# EAGLE board V0 (EAGLE 9.3.2)
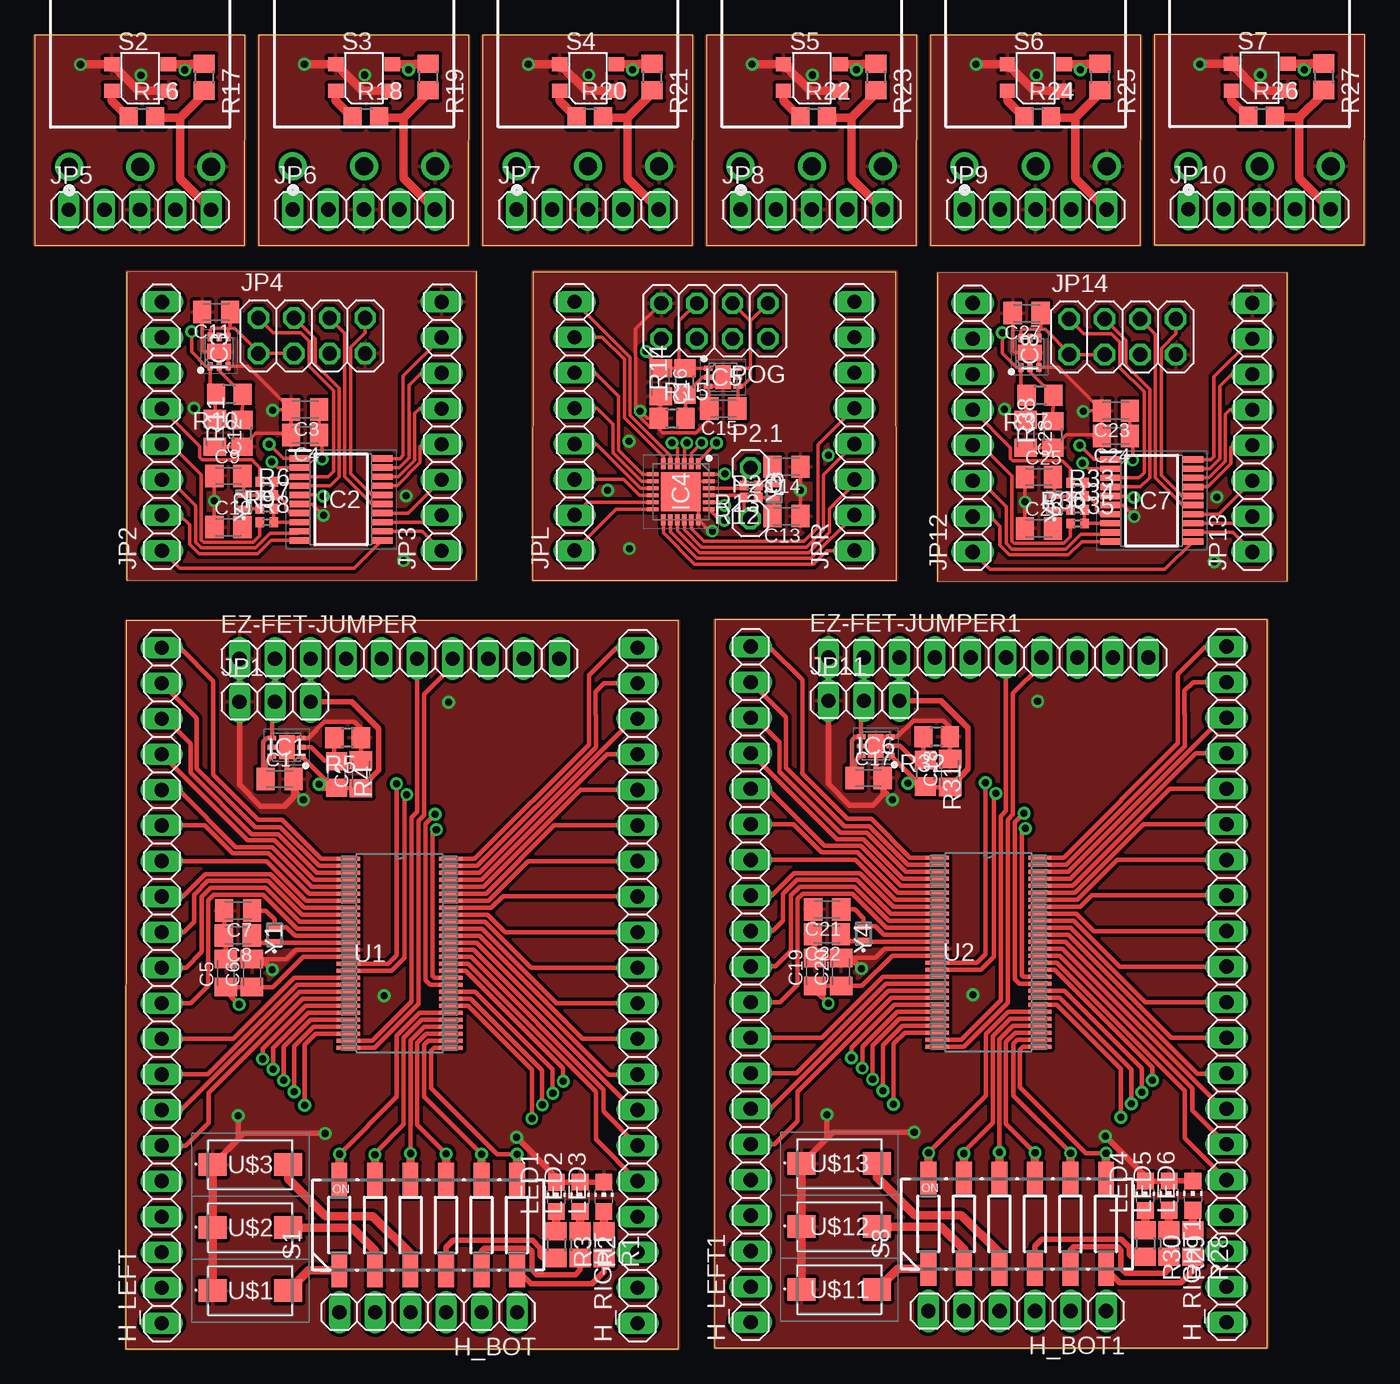
[diagram p0: board, top side]
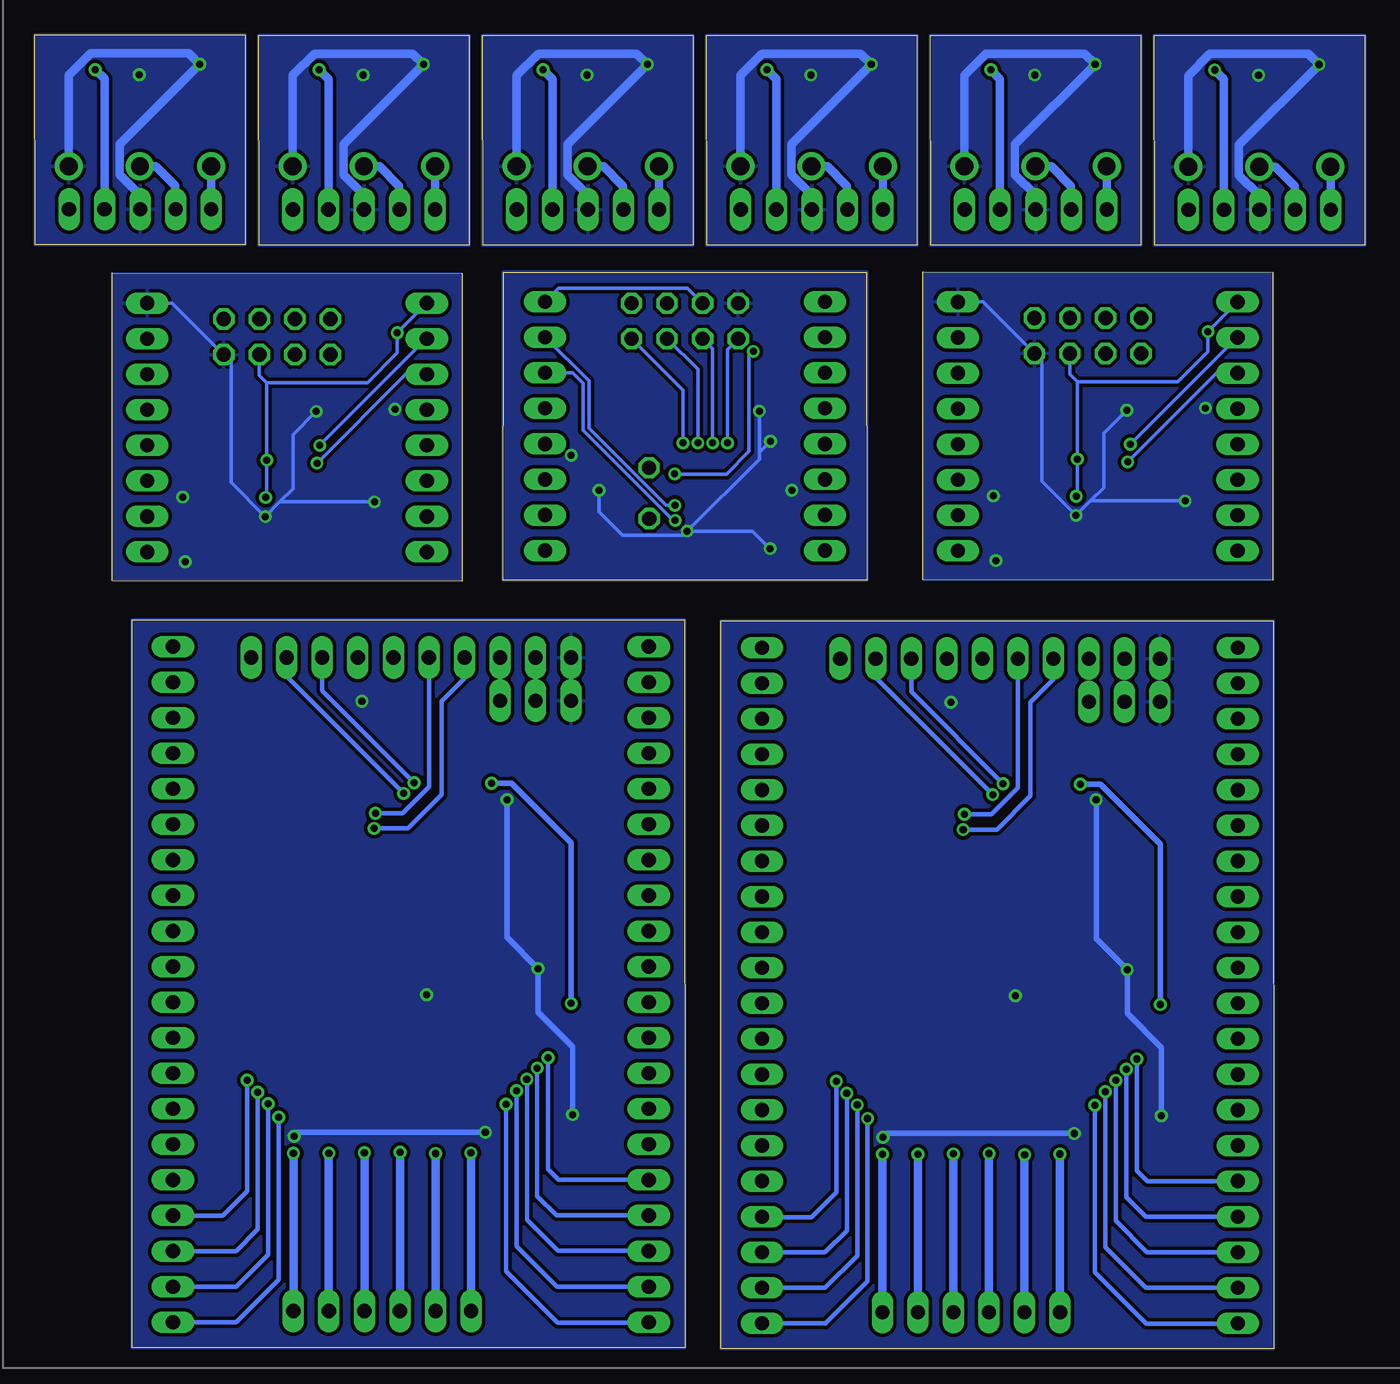
[diagram p1: board, bottom side, seen from below]

Size 95.01 x 93.86 mm. Coordinates in mm from the lower left corner, seen from the top.
Outline: 6.48,0 45.99,0.02 45.97,52.02 6.52,52.01 6.48,0
Outline: 6.56,54.92 31.55,54.95 31.56,76.94 6.57,76.92 6.56,54.92
Outline: 35.56,54.92 61.56,54.92 61.54,76.92 35.6,76.91 35.56,54.92
Outline: 0,78.83 15,78.83 15.01,93.83 0,93.83 0,78.83
Outline: 16,78.84 31,78.84 31.01,93.84 16,93.84 16,78.84
Outline: 32,78.84 47,78.84 47.01,93.84 32,93.84 32,78.84
Outline: 48,78.84 63,78.84 63.01,93.84 48,93.84 48,78.84
Outline: 64,78.84 79,78.84 79.01,93.84 64,93.84 64,78.84
Outline: 80,78.86 95,78.86 95.01,93.86 80,93.86 80,78.86
Outline: 48.57,0.08 88.08,0.1 88.06,52.1 48.61,52.09 48.57,0.08
Outline: 64.49,54.84 89.48,54.87 89.49,76.86 64.5,76.84 64.49,54.84
Copper layers (1*16): Top 0.035mm / dielectric 1.5mm / Bottom 0.035mm
Design rules "default *": minimum track width 6mil, minimum drill 0.35mm, track to track 5mil, track to pad 5mil, pad to pad 5mil, via to via 5mil, smd to smd 5mil, copper to edge 0mil, drill to drill 6mil, minimum pad ring 10mil, minimum via ring 8mil, stop-mask expansion 4mil, vias tented up to drill 0mil, thermal gap 10mil

## Footprints (pad centres in the part's own frame; a part is rotated, then mirrored left to right if it is on the bottom)
C0805K = smd 1.3 x 1.6: 1 -1,0; 2 1,0
1X10 = drill 1.016 long: 1 -11.43,0; 2 -8.89,0; 3 -6.35,0; 4 -3.81,0; 5 -1.27,0; 6 1.27,0; 7 3.81,0; 8 6.35,0; 9 8.89,0; 10 11.43,0
1X06 = drill 1.016 long: 1 -6.35,0; 2 -3.81,0; 3 -1.27,0; 4 1.27,0; 5 3.81,0; 6 6.35,0
1X20 = drill 1.016 long: 1 -24.13,0; 2 -21.59,0; 3 -19.05,0; 4 -16.51,0; 5 -13.97,0; 6 -11.43,0; 7 -8.89,0; 8 -6.35,0; 9 -3.81,0; 10 -1.27,0; 11 1.27,0; 12 3.81,0; 13 6.35,0; 14 8.89,0; 15 11.43,0; 16 13.97,0; 17 16.51,0; 18 19.05,0; 19 21.59,0; 20 24.13,0
SON65P200X200X80-7N = smd 0.6 x 0.35: 1 -1.05,0.65; 2 -1.05,0; 3 -1.05,-0.65; 4 1.05,-0.65; 5 1.05,0; 6 1.05,0.65 | smd 1.1 x 1.7: 7 0,0
SOP65P640X120-20N = smd 1.475 x 0.45: 1 -2.938,2.925; 2 -2.938,2.275; 3 -2.938,1.625; 4 -2.938,0.975; 5 -2.938,0.325; 6 -2.938,-0.325; 7 -2.938,-0.975; 8 -2.938,-1.625; 9 -2.938,-2.275; 10 -2.938,-2.925; 11 2.938,-2.925; 12 2.938,-2.275; 13 2.938,-1.625; 14 2.938,-0.975; 15 2.938,-0.325; 16 2.938,0.325; 17 2.938,0.975; 18 2.938,1.625; 19 2.938,2.275; 20 2.938,2.925
QFN50P400X400X100-25N = smd 0.8 x 0.3: 1 -2,1.25; 2 -2,0.75; 3 -2,0.25; 4 -2,-0.25; 5 -2,-0.75; 6 -2,-1.25; 13 2,-1.25; 14 2,-0.75; 15 2,-0.25; 16 2,0.25; 17 2,0.75; 18 2,1.25 | smd 0.3 x 0.8: 7 -1.25,-2; 8 -0.75,-2; 9 -0.25,-2; 10 0.25,-2; 11 0.75,-2; 12 1.25,-2; 19 1.25,2; 20 0.75,2; 21 0.25,2; 22 -0.25,2; 23 -0.75,2; 24 -1.25,2 | smd 2.8 x 2.8: 25 0,0
1X03 = drill 1.016 long: 1 -2.54,0; 2 0,0; 3 2.54,0
1X08 = drill 1.016 long: 1 -8.89,0; 2 -6.35,0; 3 -3.81,0; 4 -1.27,0; 5 1.27,0; 6 3.81,0; 7 6.35,0; 8 8.89,0
2X04 = drill 1.016 octagon: 1 -3.81,-1.27; 2 -3.81,1.27; 3 -1.27,-1.27; 4 -1.27,1.27; 5 1.27,-1.27; 6 1.27,1.27; 7 3.81,-1.27; 8 3.81,1.27
1X05 = drill 1.016 long: 1 -5.08,0; 2 -2.54,0; 3 0,0; 4 2.54,0; 5 5.08,0
CHIP-LED0805 = smd 1.2 x 1.2: A 0,-1.05; C 0,1.05
1X01 = drill 1.016 octagon: 1 0,0
R0805 = smd 1.3 x 1.5: 1 -0.95,0; 2 0.95,0
R0402 = smd 0.6 x 0.7: 1 -0.5,0; 2 0.5,0
CTS-219-06J = smd 1.13 x 2.44: 1 -6.35,-3.215; 2 -3.81,-3.215; 3 -1.27,-3.215; 4 1.27,-3.215; 5 3.81,-3.215; 6 6.35,-3.215; 7 6.35,3.215; 8 3.81,3.215; 9 1.27,3.215; 10 -1.27,3.215; 11 -3.81,3.215; 12 -6.35,3.215
D2FS-FL-N-A1 = drill 1.28 pad 2: 1 -5.08,-2.8; 2 0,-2.8; 3 5.08,-2.8
DGG56_CLEAN = smd 1.676 x 0.279: 1 -3.67,6.75; 2 -3.67,6.25; 3 -3.67,5.75; 4 -3.67,5.25; 5 -3.67,4.75; 6 -3.67,4.25; 7 -3.67,3.75; 8 -3.67,3.25; 9 -3.67,2.75; 10 -3.67,2.25; 11 -3.67,1.75; 12 -3.67,1.25; 13 -3.67,0.75; 14 -3.67,0.25; 15 -3.67,-0.25; 16 -3.67,-0.75; 17 -3.67,-1.25; 18 -3.67,-1.75; 19 -3.67,-2.25; 20 -3.67,-2.75; 21 -3.67,-3.25; 22 -3.67,-3.75; 23 -3.67,-4.25; 24 -3.67,-4.75; 25 -3.67,-5.25; 26 -3.67,-5.75; 27 -3.67,-6.25; 28 -3.67,-6.75; 29 3.67,-6.75; 30 3.67,-6.25; 31 3.67,-5.75; 32 3.67,-5.25; 33 3.67,-4.75; 34 3.67,-4.25; 35 3.67,-3.75; 36 3.67,-3.25; 37 3.67,-2.75; 38 3.67,-2.25; 39 3.67,-1.75; 40 3.67,-1.25; 41 3.67,-0.75; 42 3.67,-0.25; 43 3.67,0.25; 44 3.67,0.75; 45 3.67,1.25; 46 3.67,1.75; 47 3.67,2.25; 48 3.67,2.75; 49 3.67,3.25; 50 3.67,3.75; 51 3.67,4.25; 52 3.67,4.75; 53 3.67,5.25; 54 3.67,5.75; 55 3.67,6.25; 56 3.67,6.75
DTSM32SBF = smd 2 x 1.6: 1 -2.7,0; 2 2.7,0
4LEADSMD = smd 1.1 x 1: A -2.01,-0.97; C 2.04,0.94; E -2.01,0.94; K 2.04,-0.97
ABS05 = smd 0.5 x 1: 1 -0.55,0; 2 0.55,0

## Placement (x,y rotation side)
C1  [C0805K]  17.49,40.71 0 top
C2  [C0805K]  23.3,41.06 90 top
C3  10uF  [C0805K]  19.31,67.1 180 top
C4  100nF  [C0805K]  19.31,65.29 180 top
C5  [C0805K]  13.65,26.85 90 top
C6  [C0805K]  15.51,26.85 90 top
C7  [C0805K]  14.52,31.31 180 top
C8  [C0805K]  14.5,29.54 180 top
C9  10uF  [C0805K]  13.82,62.36 0 top
C10  10uF  [C0805K]  13.82,58.7 0 top
C11  [C0805K]  12.94,74.07 180 top
C12  [C0805K]  12.86,65.45 270 top
C13  10uF  [C0805K]  53.7,59.49 180 top
C14  10uF  [C0805K]  53.7,63.02 180 top
C15  [C0805K]  49.19,67.17 180 top
C16  [C0805K]  44.71,69.05 270 top
C17  [C0805K]  59.58,40.79 0 top
C18  [C0805K]  65.39,41.14 90 top
C19  [C0805K]  55.74,26.93 90 top
C20  [C0805K]  57.6,26.93 90 top
C21  [C0805K]  56.61,31.39 180 top
C22  [C0805K]  56.59,29.62 180 top
C23  10uF  [C0805K]  77.24,67.02 180 top
C24  100nF  [C0805K]  77.24,65.21 180 top
C25  10uF  [C0805K]  71.75,62.28 0 top
C26  10uF  [C0805K]  71.75,58.62 0 top
C27  [C0805K]  70.87,73.99 180 top
C28  [C0805K]  70.79,65.37 270 top
E$1  [METRIC_15]  -2.7,-1.33 90 top
E$2  [METRIC_15]  -2.7,-1.33 180 bottom
E$3  [METRIC_15]  -2.7,-0.33 180 bottom
E$4  [METRIC_15]  -1.7,-1.33 90 top
E$5  [METRIC_15]  -2.7,97.67 0 top  (outside the outline)
E$6  [METRIC_15]  96.29,-1.33 90 bottom
EZ-FET-JUMPER  [1X10]  26.04,49.31 0 top
EZ-FET-JUMPER1  [1X10]  68.13,49.39 0 top
H_BOT  [1X06]  28.11,2.62 180 top
H_BOT1  [1X06]  70.2,2.7 180 top
H_LEFT  [1X20]  9.06,25.96 90 top
H_LEFT1  [1X20]  51.15,26.04 90 top
H_RIGHT  [1X20]  43.06,25.96 90 top
H_RIGHT1  [1X20]  85.15,26.04 90 top
IC1  TLV75801PDRVT  [SON65P200X200X80-7N]  17.99,42.99 180 top
IC2  MSP430FR2311IPW20  [SOP65P640X120-20N]  21.87,60.68 0 top
IC3  TLV75801PDRVT  [SON65P200X200X80-7N]  13.16,71.25 90 top
IC4  MSP430FR2433IRGER  [QFN50P400X400X100-25N]  46.15,61.24 270 top
IC5  TLV75801PDRVT  [SON65P200X200X80-7N]  49.17,69.41 0 top
IC6  TLV75801PDRVT  [SON65P200X200X80-7N]  60.08,43.07 180 top
IC7  MSP430FR2311IPW20  [SOP65P640X120-20N]  79.8,60.6 0 top
IC8  TLV75801PDRVT  [SON65P200X200X80-7N]  71.09,71.17 90 top
JP1  [1X03]  17.15,46.23 0 top
JP2  [1X08]  9.08,65.9 90 top
JP3  [1X08]  29.06,65.9 90 top
JP4  [2X04]  19.78,72.38 0 top
JP5  [1X05]  7.5,81.38 0 top
JP6  [1X05]  23.5,81.39 0 top
JP7  [1X05]  39.5,81.39 0 top
JP8  [1X05]  55.5,81.39 0 top
JP9  [1X05]  71.5,81.39 0 top
JP10  [1X05]  87.5,81.41 0 top
JP11  [1X03]  59.24,46.31 0 top
JP12  [1X08]  67.01,65.82 90 top
JP13  [1X08]  86.99,65.82 90 top
JP14  [2X04]  77.71,72.3 0 top
JPL  [1X08]  38.56,65.92 90 top
JPR  [1X08]  58.56,65.92 90 top
LED1  [CHIP-LED0805]  37.25,10.86 0 top
LED2  [CHIP-LED0805]  38.95,10.87 0 top
LED3  [CHIP-LED0805]  40.65,10.87 0 top
LED4  [CHIP-LED0805]  79.34,10.94 0 top
LED5  [CHIP-LED0805]  81.04,10.95 0 top
LED6  [CHIP-LED0805]  82.74,10.95 0 top
P2.0  [1X01]  51.11,59.31 0 top
P2.1  [1X01]  51.13,62.95 0 top
POG  [2X04]  48.57,73.43 180 top
R1  [R0805]  40.65,7.45 270 top
R2  [R0805]  38.95,7.45 270 top
R3  [R0805]  37.25,7.45 270 top
R4  [R0805]  21.54,41.04 270 top
R5  [R0805]  22.34,43.65 180 top
R6  [R0402]  16.57,60.99 0 top
R7  [R0402]  16.57,60.02 0 top
R8  [R0402]  16.57,59.05 0 top
R9  [R0402]  16.57,61.95 180 top
R10  [R0805]  13.89,68.19 180 top
R11  [R0805]  14.82,65.4 90 top
R12  [R0402]  51.17,60.82 180 top
R13  [R0402]  51.17,61.68 180 top
R14  [R0805]  46.44,69.1 90 top
R15  [R0805]  45.53,66.48 0 top
R16  100  [R0805]  7.65,87.94 0 top
R17  100K  [R0805]  12.1,90.85 270 top
R18  100  [R0805]  23.65,87.95 0 top
R19  100K  [R0805]  28.1,90.86 270 top
R20  100  [R0805]  39.65,87.95 0 top
R21  100K  [R0805]  44.1,90.86 270 top
R22  100  [R0805]  55.65,87.95 0 top
R23  100K  [R0805]  60.1,90.86 270 top
R24  100  [R0805]  71.65,87.95 0 top
R25  100K  [R0805]  76.1,90.86 270 top
R26  100  [R0805]  87.65,87.97 0 top
R27  100K  [R0805]  92.1,90.88 270 top
R28  [R0805]  82.74,7.53 270 top
R29  [R0805]  81.04,7.53 270 top
R30  [R0805]  79.34,7.53 270 top
R31  [R0805]  63.63,41.12 270 top
R32  [R0805]  64.43,43.73 180 top
R33  [R0402]  74.5,60.91 0 top
R34  [R0402]  74.5,59.94 0 top
R35  [R0402]  74.5,58.97 0 top
R36  [R0402]  74.5,61.87 180 top
R37  [R0805]  71.82,68.11 180 top
R38  [R0805]  72.75,65.32 90 top
S1  219-06J  [CTS-219-06J]  28.1,8.85 0 top
S2  D2FS-FL-N-A1  [D2FS-FL-N-A1]  7.51,87.26 0 top
S3  D2FS-FL-N-A1  [D2FS-FL-N-A1]  23.51,87.27 0 top
S4  D2FS-FL-N-A1  [D2FS-FL-N-A1]  39.51,87.27 0 top
S5  D2FS-FL-N-A1  [D2FS-FL-N-A1]  55.51,87.27 0 top
S6  D2FS-FL-N-A1  [D2FS-FL-N-A1]  71.51,87.27 0 top
S7  D2FS-FL-N-A1  [D2FS-FL-N-A1]  87.51,87.29 0 top
S8  219-06J  [CTS-219-06J]  70.19,8.93 0 top
U1  MSP430FR4133IG56RDGG56-CLEAN  [DGG56_CLEAN]  26.05,28.26 0 top
U2  MSP430FR4133IG56RDGG56-CLEAN  [DGG56_CLEAN]  68.14,28.34 0 top
U$1  DTSM-32S-BF  [DTSM32SBF]  15.39,4.16 0 top
U$2  DTSM-32S-BF  [DTSM32SBF]  15.39,8.66 0 top
U$3  DTSM-32S-BF  [DTSM32SBF]  15.39,13.16 0 top
U$4  [METRIC_15]  6.48,0 90 top
U$5  [METRIC_15]  6.48,0 180 bottom
U$6  QRE1113GR  [4LEADSMD]  7.5,90.83 0 top
U$7  [METRIC_15]  0,78.83 90 top
U$8  [METRIC_15]  0,78.83 180 bottom
U$9  QRE1113GR  [4LEADSMD]  23.5,90.84 0 top
U$10  QRE1113GR  [4LEADSMD]  87.5,90.86 0 top
U$11  DTSM-32S-BF  [DTSM32SBF]  57.48,4.24 0 top
U$12  DTSM-32S-BF  [DTSM32SBF]  57.48,8.74 0 top
U$13  DTSM-32S-BF  [DTSM32SBF]  57.48,13.24 0 top
U$15  QRE1113GR  [4LEADSMD]  39.5,90.84 0 top
U$21  QRE1113GR  [4LEADSMD]  55.5,90.84 0 top
U$27  QRE1113GR  [4LEADSMD]  71.5,90.84 0 top
Y1  ABS05-32.768KHZ-9-T  [ABS05]  17.12,29.58 90 top
Y2  ABS05-32.768KHZ-9-T  [ABS05]  14.91,60.52 90 top
Y3  ABS05-32.768KHZ-9-T  [ABS05]  52.82,61.25 270 top
Y4  ABS05-32.768KHZ-9-T  [ABS05]  59.21,29.66 90 top
Y5  ABS05-32.768KHZ-9-T  [ABS05]  72.84,60.44 90 top

## Library data of the parts
C1-C28 = rcl; SPICEPREFIX: C
E$1-E$6 U$4 U$5 U$7 U$8 = ruler
EZ-FET-JUMPER EZ-FET-JUMPER1 H_BOT H_BOT1 H_LEFT H_LEFT1 H_RIGHT H_RIGHT1 JP1-JP14 JPL JPR P2.0 P2.1 POG = pinhead
IC1 IC3 IC5 IC6 IC8 = TLV75801PDRVT; DESCRIPTION: LDO Voltage Regulators 500MA LDO WITHOUT PG; HEIGHT: 0.8mm; MANUFACTURER_NAME: Texas Instruments; MANUFACTURER_PART_NUMBER: TLV75801PDRVT; MOUSER_PART_NUMBER: 595-TLV75801PDRVT; MOUSER_PRICE-STOCK: https://www.mouser.com/Search/Refine.aspx?Keyword=595-TLV75801PDRVT
IC2 IC7 = MSP430FR2311IPW20; DESCRIPTION: 16-bit Microcontrollers - MCU 16 MHz Ultra-low-power microcontroller with 4 KB FRAM, 1 KB SRAM, 12 IO, 8 ch ADC10, OpAmps, TIA 20-TSSOP -40 to 85; HEIGHT: 1.2mm; MANUFACTURER_NAME: Texas Instruments; MANUFACTURER_PART_NUMBER: MSP430FR2311IPW20; MOUSER_PART_NUMBER: 595-SP430FR2311IPW20; MOUSER_PRICE-STOCK: https://www.mouser.com/Search/Refine.aspx?Keyword=595-SP430FR2311IPW20
IC4 = MSP430FR2433IRGER; DESCRIPTION: 16 MHz Ultra-Low-Power Microcontroller with 16 KB FRAM, 4 KB RAM, 10-bit ADC, 19 IO, 4 16-bit Timers; HEIGHT: 1mm; MANUFACTURER_NAME: Texas Instruments; MANUFACTURER_PART_NUMBER: MSP430FR2433IRGER; MOUSER_PART_NUMBER: 595-SP430FR2433IRGER; MOUSER_PRICE-STOCK: https://www.mouser.com/Search/Refine.aspx?Keyword=595-SP430FR2433IRGER
LED1-LED6 = led
R1-R38 = rcl; SPICEPREFIX: R
S1 S8 = switch-dil; OC_FARNELL: unknown; OC_NEWARK: unknown
S2-S7 = D2FS-FL-N-A1; ALLIED_NUMBER: 70454797; DESCRIPTION: Microswitch, SPST-NO, lever operated, right angle; HEIGHT: mm; MANUFACTURER_NAME: Omron Electronics; MANUFACTURER_PART_NUMBER: D2FS-FL-N-A1; RS_PART_NUMBER: 8046183; RS_PRICE-STOCK: http://uk.rs-online.com/web/p/products/8046183
U1 U2 = MSP430FR4133IG56R
U$1-U$3 U$11-U$13 = DTSM-32S-B
U$6 U$9 U$10 U$15 U$21 U$27 = QRE1113GR; AVAILABILITY: Unavailable; DESCRIPTION: QRE1113 Series 30 V 50 mA Miniature Reflective Object Sensor - SMD-4; MF: ON Semiconductor; MP: QRE1113GR; PACKAGE: SMD-4 ON Semiconductor; PRICE: None
Y1-Y5 = ABS05-32.768KHZ-9-T; DESCRIPTION: Crystals 32.768KHz 9.0pF 20ppm -40C +85C; HEIGHT: mm; MANUFACTURER_NAME: ABRACON; MANUFACTURER_PART_NUMBER: ABS05-32.768KHZ-9-T; MOUSER_PART_NUMBER: 815-ABS05-32.768K9T; MOUSER_PRICE-STOCK: https://www.mouser.com/Search/Refine.aspx?Keyword=815-ABS05-32.768K9T; RS_PART_NUMBER: 815-ABS05-32.768K9T; RS_PRICE-STOCK: https://www.mouser.com/Search/Refine.aspx?Keyword=815-ABS05-32.768K9T

## Nets
+3V1: C3.1 C4.1 C12.1 IC2.5 IC3.1 JP2.8 JP4.5 R10.2
+3V2: C16.1 IC4.24 IC5.1 JPR.8 POG.5 R14.2
+3V3: C2.1 C5.1 C6.1 EZ-FET-JUMPER.3 IC1.1 JP1.3 R4.2 U1.15
+3V4: C18.1 C19.1 C20.1 EZ-FET-JUMPER1.3 IC6.1 JP11.3 R31.2 U2.15
+3V5: C23.1 C24.1 C28.1 IC7.5 IC8.1 JP12.8 JP14.5 R37.2
+5V: C1.1 EZ-FET-JUMPER.2 IC1.4 IC1.6 JP1.2
+5V1: C11.1 IC3.4 IC3.6 JP4.1 JP4.3
+5V2: C15.1 IC5.4 IC5.6 POG.1 POG.3
+5V3: C17.1 EZ-FET-JUMPER1.2 IC6.4 IC6.6 JP11.2
+5V4: C27.1 IC8.4 IC8.6 JP14.1 JP14.3
CTS: EZ-FET-JUMPER.5 U1.38
CTS1: EZ-FET-JUMPER1.5 U2.38
GND: C1.2 C2.2 C5.2 C6.2 C7.2 C8.2 EZ-FET-JUMPER.1 IC1.3 IC1.7 JP1.1 LED1.C LED2.C LED3.C R5.1 U1.14 U$1.1 U$2.1 U$3.1
GND1: C3.2 C4.2 C9.1 C10.1 C11.2 C12.2 IC2.6 IC3.3 IC3.7 JP3.8 JP4.7 R11.1
GND2: C13.1 C14.1 C15.2 C16.2 IC4.18 IC4.23 IC4.25 IC5.3 IC5.7 POG.7 R15.1
GND3: JP5.3 S2.3 U$6.E U$6.K
GND4: JP6.3 S3.3 U$9.E U$9.K
GND5: JP7.3 S4.3 U$15.E U$15.K
GND6: JP8.3 S5.3 U$21.E U$21.K
GND7: JP9.3 S6.3 U$27.E U$27.K
GND8: JP10.3 S7.3 U$10.E U$10.K
GND9: C17.2 C18.2 C19.2 C20.2 C21.2 C22.2 EZ-FET-JUMPER1.1 IC6.3 IC6.7 JP11.1 LED4.C LED5.C LED6.C R32.1 U2.14 U$11.1 U$12.1 U$13.1
GND10: C23.2 C24.2 C25.1 C26.1 C27.2 C28.2 IC7.6 IC8.3 IC8.7 JP13.8 JP14.7 R38.1
N$1: R1.2 S1.6
N$2: R2.2 S1.5
N$3: R3.2 S1.4
N$4: LED1.A R3.1
N$5: LED2.A R2.1
N$6: LED3.A R1.1
N$7: S1.1 U$1.2
N$8: S1.2 U$2.2
N$9: S1.3 U$3.2
N$10: IC2.7 R6.2 R9.1
N$11: IC2.8 R7.2 R8.2
N$12: IC1.2 R4.1 R5.2
N$13: IC3.2 R10.1 R11.2
N$14: C8.1 U1.13 Y1.1
N$15: C9.2 R6.1 Y2.2
N$16: C7.1 U1.12 Y1.2
N$17: C10.2 R7.1 Y2.1
N$18: IC5.2 R14.1 R15.2
N$19: C13.2 R12.1 Y3.2
N$20: C14.2 R13.1 Y3.1
N$21: R16.1 U$6.A
N$22: JP5.4 R17.1 U$6.C
N$23: JP5.2 S2.2
N$24: JP5.1 S2.1
N$25: R18.1 U$9.A
N$26: JP6.4 R19.1 U$9.C
N$27: JP6.2 S3.2
N$28: JP6.1 S3.1
N$29: R20.1 U$15.A
N$30: JP7.4 R21.1 U$15.C
N$31: JP7.2 S4.2
N$32: JP7.1 S4.1
N$33: R22.1 U$21.A
N$34: JP8.4 R23.1 U$21.C
N$35: JP8.2 S5.2
N$36: JP8.1 S5.1
N$37: R24.1 U$27.A
N$38: JP9.4 R25.1 U$27.C
N$39: JP9.2 S6.2
N$40: JP9.1 S6.1
N$41: R26.1 U$10.A
N$42: JP10.4 R27.1 U$10.C
N$43: JP10.2 S7.2
N$44: JP10.1 S7.1
N$45: C21.1 U2.12 Y4.2
N$46: C22.1 U2.13 Y4.1
N$47: LED4.A R30.1
N$48: LED5.A R29.1
N$49: LED6.A R28.1
N$50: S8.1 U$11.2
N$51: S8.2 U$12.2
N$52: S8.3 U$13.2
N$53: IC6.2 R31.1 R32.2
N$54: R28.2 S8.6
N$55: R29.2 S8.5
N$56: R30.2 S8.4
N$57: IC7.7 R33.2 R36.1
N$58: IC7.8 R34.2 R35.2
N$59: IC8.2 R37.1 R38.2
N$60: C25.2 R33.1 Y5.2
N$61: C26.2 R34.1 Y5.1
N/C: EZ-FET-JUMPER.10
N/C1: EZ-FET-JUMPER1.10
P1.0: IC2.2 JP2.6
P1.1: IC2.1 JP2.7
P1.2: H_LEFT.1 U1.26
P1.3: H_LEFT.2 U1.25
P1.4: H_LEFT.3 U1.24
P1.5: H_LEFT.4 U1.23
P1.6: H_LEFT.5 U1.22
P1.7: H_LEFT.6 U1.21
P1.8: IC2.20 JP3.7
P1.9: IC2.19 JP3.6
P1.10: IC2.18 JP3.5
P1.11: IC2.17 JP3.4
P1.12: IC4.10 JPL.3
P1.13: IC4.9 JPL.4
P1.14: IC4.8 JPL.5
P1.15: IC4.7 JPL.6
P1.16: IC4.5 JPL.8
P1.17: IC4.6 JPL.7
P1.18: H_LEFT1.6 U2.21
P1.19: H_LEFT1.5 U2.22
P1.20: H_LEFT1.4 U2.23
P1.21: H_LEFT1.3 U2.24
P1.22: H_LEFT1.2 U2.25
P1.23: H_LEFT1.1 U2.26
P1.24: IC7.1 JP12.7
P1.25: IC7.2 JP12.6
P1.26: IC7.20 JP13.7
P1.27: IC7.19 JP13.6
P1.28: IC7.18 JP13.5
P1.29: IC7.17 JP13.4
P2.0: H_RIGHT.6 U1.42
P2.1: H_RIGHT.5 U1.41
P2.2: H_RIGHT.4 U1.40
P2.3: IC2.14 JP3.3
P2.4: IC2.13 JP3.2
P2.5: H_RIGHT.3 U1.37
P2.6: H_RIGHT.2 U1.36
P2.7: H_RIGHT.1 U1.35
P2.8: IC2.12 JP3.1
P2.9: JP2.5 R9.2
P2.10: JP2.4 R8.1
P2.11: IC2.9 JP2.3
P2.12: IC2.10 JP2.2
P2.13: IC2.11 JP2.1
P2.14: IC4.17 JPR.5
P2.15: IC4.16 JPR.4
P2.16: IC4.15 JPR.3
P2.17: IC4.13 JPR.1
P2.18: IC4.11 JPL.2
P2.19: IC4.19 JPR.6
P2.20: H_RIGHT1.6 U2.42
P2.21: H_RIGHT1.5 U2.41
P2.22: H_RIGHT1.4 U2.40
P2.23: H_RIGHT1.3 U2.37
P2.24: H_RIGHT1.2 U2.36
P2.25: H_RIGHT1.1 U2.35
P2.26: IC7.14 JP13.3
P2.27: IC7.13 JP13.2
P2.28: IC7.12 JP13.1
P2.29: JP12.5 R36.2
P2.30: JP12.4 R35.1
P2.31: IC7.9 JP12.3
P2.32: IC7.10 JP12.2
P2.33: IC7.11 JP12.1
P3.0: H_RIGHT.20 U1.56
P3.1: H_RIGHT.19 U1.55
P3.2: H_RIGHT.18 U1.54
P3.3: H_RIGHT.17 U1.53
P3.4: H_RIGHT.16 U1.52
P3.5: H_RIGHT.15 U1.51
P3.6: H_RIGHT.14 U1.50
P3.7: H_RIGHT.13 U1.49
P3.8: IC4.14 JPR.2
P3.9: IC4.12 JPL.1
P3.10: IC4.20 JPR.7
P3.11: H_RIGHT1.20 U2.56
P3.12: H_RIGHT1.19 U2.55
P3.13: H_RIGHT1.18 U2.54
P3.14: H_RIGHT1.17 U2.53
P3.15: H_RIGHT1.16 U2.52
P3.16: H_RIGHT1.15 U2.51
P3.17: H_RIGHT1.14 U2.50
P3.18: H_RIGHT1.13 U2.49
P4.0: H_LEFT.9 U1.18
P4.1: H_LEFT1.14 U2.7
P4.2: H_LEFT1.13 U2.8
P4.3: H_LEFT.10 U1.11
P4.4: H_LEFT.11 U1.10
P4.5: H_LEFT.12 U1.9
P4.6: H_LEFT.13 U1.8
P4.7: H_LEFT.14 U1.7
P4.8: H_LEFT1.12 U2.9
P4.9: H_LEFT1.11 U2.10
P4.10: H_LEFT1.10 U2.11
P4.11: H_LEFT1.9 U2.18
P5.0: H_BOT.6 S1.12 U1.34
P5.1: H_BOT.5 S1.11 U1.33
P5.2: H_BOT.4 S1.10 U1.32
P5.3: H_BOT.3 S1.9 U1.31
P5.4: H_BOT.2 S1.8 U1.30
P5.5: H_BOT.1 S1.7 U1.29
P5.6: H_BOT1.1 S8.7 U2.29
P5.7: H_BOT1.2 S8.8 U2.30
P5.8: H_BOT1.6 S8.12 U2.34
P5.9: H_BOT1.5 S8.11 U2.33
P5.10: H_BOT1.4 S8.10 U2.32
P5.11: H_BOT1.3 S8.9 U2.31
P6.0: H_RIGHT.12 U1.48
P6.1: H_RIGHT.11 U1.47
P6.2: H_RIGHT.10 U1.46
P6.3: H_RIGHT.9 U1.45
P6.4: H_RIGHT.8 U1.44
P6.5: H_RIGHT.7 U1.43
P6.6: H_RIGHT1.12 U2.48
P6.7: H_RIGHT1.11 U2.47
P6.8: H_RIGHT1.10 U2.46
P6.9: H_RIGHT1.9 U2.45
P6.10: H_RIGHT1.8 U2.44
P6.11: H_RIGHT1.7 U2.43
P7.0: H_LEFT.15 U1.6
P7.1: H_LEFT.16 U1.5
P7.2: H_LEFT.17 U1.4
P7.3: H_LEFT.18 U1.3
P7.4: H_LEFT.19 U1.2
P7.5: H_LEFT.20 U1.1
P7.6: H_LEFT1.20 U2.1
P7.7: H_LEFT1.18 U2.3
P7.8: H_LEFT1.19 U2.2
P7.9: H_LEFT1.17 U2.4
P7.10: H_LEFT1.16 U2.5
P7.11: H_LEFT1.15 U2.6
P8.1: H_LEFT1.8 U2.19
P8.2: H_LEFT.7 U1.20
P8.3: H_LEFT.8 U1.19
P8.4: H_LEFT1.7 U2.20
RST: EZ-FET-JUMPER.8 U1.16
RST1: IC2.4 JP4.4
RST2: IC4.1 POG.2
RST3: EZ-FET-JUMPER1.8 U2.16
RST4: IC7.4 JP14.4
RTS: EZ-FET-JUMPER.4 U1.39
RTS1: EZ-FET-JUMPER1.4 U2.39
RXD: EZ-FET-JUMPER.6 U1.27
RXD1: IC2.16 JP4.8
RXD2: IC4.4 POG.8
RXD3: EZ-FET-JUMPER1.6 U2.27
RXD4: IC7.16 JP14.8
TST: EZ-FET-JUMPER.9 U1.17
TST1: IC2.3 JP4.2
TST2: IC4.2 POG.4
TST3: EZ-FET-JUMPER1.9 U2.17
TST4: IC7.3 JP14.2
TXD: EZ-FET-JUMPER.7 U1.28
TXD1: IC2.15 JP4.6
TXD2: IC4.3 POG.6
TXD3: EZ-FET-JUMPER1.7 U2.28
TXD4: IC7.15 JP14.6
VCC: JP5.5 R16.2 R17.2
VCC1: JP6.5 R18.2 R19.2
VCC2: JP7.5 R20.2 R21.2
VCC3: JP8.5 R22.2 R23.2
VCC4: JP9.5 R24.2 R25.2
VCC5: JP10.5 R26.2 R27.2
XIN: IC4.22 P2.1.1 R13.2
XOUT: IC4.21 P2.0.1 R12.2

## Tracks (layer width: path | path; a pad name or v marks a point on that pad's centre or on a via)
+3V1  (via drill 0.5)
  Top 0.254: IC2.5 20.5,61.01 v20.6,60.91 | 12.86,68.27 12.51,68.62 IC3.1 12.21,70.2 11.19,71.22 v11.19,72.67 | 12.86,68.27 R10.2 | v20.52,63.57 20.52,65.08 C4.1 C3.1 | C12.1 12.86,68.27
  Bottom 0.254: v20.6,60.91 20.52,60.99 v20.52,63.57 20.52,69.09 | 20.52,69.09 13.33,69.09 11.19,71.23 v11.19,72.67 9.08,74.78 JP2.8 | JP4.5 21.05,69.62 20.52,69.09
+3V2  (via drill 0.5)
  Top 0.254: 46.04,70.05 C16.1 43.68,71.08 v43.68,71.26 | 46.04,70.05 R14.2 IC5.1 | POG.5 46.04,73.44 46.04,70.05 | IC4.24 v49.29,62.49 v49.3,62.5
  Bottom 0.254: POG.5 48.37,75.77 55.03,75.77 57.6,75.77 JPR.8 | v49.3,62.5 v49.29,62.49 45.61,62.49 43.98,64.11 43.98,70.95 v43.68,71.26
+3V3  (via drill 0.51)
  Top 0.305: IC1.1 21.29,40.09 R4.2 21.57,40.06 C2.1 | U1.15 19.17,28.02 17,25.85 C6.1 C5.1
  Top 0.406: C5.1 13.65,25.55 v14.6,24.6 | C2.1 24.57,41.33 24.57,44.3 22.64,46.23 JP1.3 EZ-FET-JUMPER.3 | 21.57,40.06 20.57,40.06 v20.3,40.33
  Bottom 0.406: v20.3,40.33 18.87,40.33 14.6,36.06 v14.6,24.6
+3V4  (via drill 0.51)
  Top 0.254: v62.39,40.41 63.27,40.41 63.51,40.17
  Top 0.305: IC6.1 63.38,40.17 63.51,40.17 R31.2 63.66,40.14 C18.1 | U2.15 61.26,28.1 59.09,25.93 C20.1 C19.1
  Top 0.406: C19.1 55.74,25.63 v56.69,24.68 | C18.1 66.66,41.41 66.66,44.38 64.73,46.31 JP11.3 EZ-FET-JUMPER1.3
  Bottom 0.406: v62.39,40.41 60.96,40.41 56.69,36.14 v56.69,24.68
+3V5  (via drill 0.5)
  Top 0.254: IC7.5 78.44,60.93 v78.53,60.83 | 70.8,68.19 70.44,68.54 IC8.1 70.14,70.12 69.12,71.14 v69.12,72.59 | 70.8,68.19 R37.2 | v78.45,63.49 78.45,65 C24.1 C23.1 | C28.1 70.8,68.19
  Bottom 0.254: v78.53,60.83 78.45,60.91 v78.45,63.49 78.45,69.01 | 78.45,69.01 71.26,69.01 69.12,71.15 v69.12,72.59 67.01,74.7 JP12.8 | JP14.5 78.98,69.54 78.45,69.01
+5V
  Top 0.305: JP1.2 16.94,46.02 IC1.4 16.55,43.64 16.3,43.39 16.3,41.41 16.49,41.22 | IC1.6 16.49,41.89 16.49,41.22 | 16.49,41.22 C1.1
  Top 0.406: JP1.2 EZ-FET-JUMPER.2
+5V1
  Top 0.254: JP4.1 16.06,71.11 | 16.06,71.11 JP4.3 | IC3.6 12.51,72.76 12.66,72.91 13.74,72.91 | 13.74,72.91 13.81,72.84 IC3.4 | C11.1 13.94,72.94 13.91,72.91 | 13.74,72.91 13.91,72.91 | 13.91,72.91 14.26,72.91 16.06,71.11
+5V2
  Top 0.254: 51.12,73.42 POG.3 | POG.1 51.12,73.44 51.12,73.42 | 51.12,73.42 51.12,70.1 | 51.12,70.1 51.12,69.33 50.55,68.76 IC5.4 50.22,67.2 C15.1 | IC5.6 51.08,70.06 51.12,70.1
+5V3
  Top 0.305: JP11.2 59.03,46.1 IC6.4 58.64,43.72 58.39,43.47 58.39,41.49 58.58,41.3 | IC6.6 58.58,41.97 58.58,41.3 | 58.58,41.3 C17.1
  Top 0.406: JP11.2 EZ-FET-JUMPER1.2
+5V4
  Top 0.254: JP14.1 73.99,71.03 | 73.99,71.03 JP14.3 | IC8.6 70.44,72.68 70.59,72.83 71.67,72.83 | 71.67,72.83 71.74,72.76 IC8.4 | C27.1 71.87,72.86 71.84,72.83 | 71.67,72.83 71.84,72.83 | 71.84,72.83 72.19,72.83 73.99,71.03
CTS  (via drill 0.51)
  Top 0.305: U1.38 28.24,26.01 27.93,26.32 27.93,37.53 v28.59,38.19
  Bottom 0.305: v28.59,38.19 26.66,38.19 24.77,40.08 EZ-FET-JUMPER.5
CTS1  (via drill 0.51)
  Top 0.305: U2.38 70.33,26.09 70.02,26.4 70.02,37.61 v70.68,38.27
  Bottom 0.305: v70.68,38.27 68.75,38.27 66.86,40.16 EZ-FET-JUMPER1.5
GND  (via drill 0.51)
  Top 0.305: C1.2 17.99,41.21 IC1.7 18.64,43.64 IC1.3 19.51,43.64 20.68,44.81 22.81,44.81 23.29,44.33 R5.1 C2.2 | 12.69,5.05 12.45,4.81 12.45,4.4 U$1.1 | C7.2 13.52,29.56 C8.2 13.65,29.39 C5.2 C6.2 17.96,27.85 18.62,28.51 U1.14
  Top 0.406: C6.2 16.2,27.85 v16.96,27.09 | EZ-FET-JUMPER.1 JP1.1 14.61,40.29 16.13,38.77 17.8,38.77 18.52,39.49 18.49,39.52 C1.2 18.49,39.93 v19.18,39.24 | LED3.C LED2.C LED1.C 37.25,12.27 v34.41,15.11 | U$3.1 14.51,14.98 | 14.51,14.98 v14.51,16.66 | 14.51,14.98 14.92,15.39 v20.74,15.39
  Top 0.61: U$3.1 U$2.1 12.69,4.64 12.45,4.4
  Bottom 0.406: v14.51,16.66 14.51,21.51 16.96,23.96 v16.96,27.09 19.18,29.31 v19.18,39.24 | v20.74,15.39 34.13,15.39 v34.41,15.11
  other vias: 29.56,46.19 24.94,25.23
  pour Top (isolate 0.254): 6.52,52.01 45.98,52.01 45.98,0.02 6.52,0.02
  pour Bottom (isolate 0.254): 6.52,52.01 45.98,52.01 45.98,0.02 6.52,0.02
GND1  (via drill 0.5)
  Top 0.254: C9.1 v12.82,60.58 C10.1 | IC2.6 19.82,60.36 v20.62,59.55 v20.62,59.54 | C11.2 11.94,71.38 12.08,71.24 12.09,71.25 IC3.7 13.81,70.6 IC3.3 15.21,70.2 C3.2 | C3.2 18.31,65.4 | 18.31,65.4 C4.2 | C3.2 17.03,67.1 v16.98,67.05 | C12.2 R11.1 15.77,65.4 18.31,65.4
  Bottom 0.254: 19.58,60.58 v20.62,59.54 23.06,61.98 23.06,70.58 JP4.7 27.27,74.79 JP3.8 | 19.58,60.58 18.63,61.53 18.63,65.4 v16.98,67.05 | v12.82,60.58 19.58,60.58
  other vias: 26.34,56.31 26.52,60.93 11.36,67.21
  pour Bottom (isolate 0.254): 6.56,76.92 31.54,76.92 31.54,54.92 6.56,54.92
  pour Top (isolate 0.254): 6.56,76.92 6.56,54.95 31.56,54.95 31.56,76.93 6.55,76.93
GND2  (via drill 0.5)
  Top 0.254: IC5.7 48.52,68.76 IC5.3 48.12,67.24 C15.2 48.19,66.39 47.25,65.45 44.85,65.45 44.58,65.72 44.58,65.86 | C16.2 44.71,67.75 | 44.71,67.75 44.71,66.61 R15.1 | 44.58,65.86 R15.1 | C14.1 v54.7,61.34 C13.1 | IC4.23 46.56,61.99 46.41,61.84 46.41,61.5 IC4.25 47.4,59.99 IC4.18 48.22,58.42 v48.4,58.42 | 44.24,67.75 44.71,67.75 | POG.7 42.92,72.86 42.92,71.03 42.93,71.02 42.93,66.86 43.92,65.86 44.58,65.86 | R15.1 43.77,66.48 v43.25,66.99
  Bottom 0.254: v48.4,58.42 48.71,58.11 53.02,58.11 54.7,59.79 v54.7,61.34 | v43.25,66.99 43.25,64.04 | v48.4,58.42 43.25,63.57 43.25,64.04 | 43.25,64.04 v42.45,64.84 | v42.47,57.17 43.72,58.42 v48.4,58.42
  other vias: 40.93,61.34 56.69,63.83
  pour Top (isolate 0.254): 35.59,76.93 61.56,76.93 61.56,54.92 35.59,54.92
  pour Bottom (isolate 0.254): 35.57,76.93 61.56,76.93 61.56,54.92 35.57,54.92
GND3  (via drill 0.51)
  Top 0.61: U$6.K 7.4,89.86 U$6.E 3.27,91.77 v3.25,91.75
  Bottom 0.61: S2.3 12.59,90.96 11.04,92.51 4.01,92.51 v3.25,91.75 8.97,86.03 8.97,83.86 7.5,82.39 JP5.3
  other vias: 7.57,90.99
  pour Bottom (isolate 0.254): 0,78.83 0,93.84 15.01,93.84 15.01,78.83
  pour Top (isolate 0.254): 0,78.83 15,78.83 15,93.81 0,93.81
GND4  (via drill 0.51)
  Top 0.61: U$9.K 23.4,89.87 U$9.E 19.27,91.78 v19.25,91.76
  Bottom 0.61: S3.3 28.59,90.97 27.04,92.52 20.01,92.52 v19.25,91.76 24.97,86.04 24.97,83.87 23.5,82.4 JP6.3
  other vias: 23.57,91
  pour Bottom (isolate 0.254): 16,78.84 16,93.85 31.01,93.85 31.01,78.84
  pour Top (isolate 0.254): 16,78.84 31,78.84 31,93.82 16,93.82
GND5  (via drill 0.51)
  Top 0.61: U$15.K 39.4,89.87 U$15.E 35.27,91.78 v35.25,91.76
  Bottom 0.61: S4.3 44.59,90.97 43.04,92.52 36.01,92.52 v35.25,91.76 40.97,86.04 40.97,83.87 39.5,82.4 JP7.3
  other vias: 39.57,91
  pour Bottom (isolate 0.254): 32,78.84 32,93.85 47.01,93.85 47.01,78.84
  pour Top (isolate 0.254): 32,78.84 47,78.84 47,93.82 32,93.82
GND6  (via drill 0.51)
  Top 0.61: U$21.K 55.4,89.87 U$21.E 51.27,91.78 v51.25,91.76
  Bottom 0.61: S5.3 60.59,90.97 59.04,92.52 52.01,92.52 v51.25,91.76 56.97,86.04 56.97,83.87 55.5,82.4 JP8.3
  other vias: 55.57,91
  pour Bottom (isolate 0.254): 48,78.84 48,93.85 63.01,93.85 63.01,78.84
  pour Top (isolate 0.254): 48,78.84 63,78.84 63,93.82 48,93.82
GND7  (via drill 0.51)
  Top 0.61: U$27.K 71.4,89.87 U$27.E 67.27,91.78 v67.25,91.76
  Bottom 0.61: S6.3 76.59,90.97 75.04,92.52 68.01,92.52 v67.25,91.76 72.97,86.04 72.97,83.87 71.5,82.4 JP9.3
  other vias: 71.57,91
  pour Bottom (isolate 0.254): 64,78.84 64,93.85 79.01,93.85 79.01,78.84
  pour Top (isolate 0.254): 64,78.84 79,78.84 79,93.82 64,93.82
GND8  (via drill 0.51)
  Top 0.61: U$10.K 87.4,89.89 U$10.E 83.27,91.8 v83.25,91.78
  Bottom 0.61: S7.3 92.59,90.99 91.04,92.54 84.01,92.54 v83.25,91.78 88.97,86.06 88.97,83.89 87.5,82.42 JP10.3
  other vias: 87.57,91.02
  pour Bottom (isolate 0.254): 80,78.86 80,93.87 95.01,93.87 95.01,78.86
  pour Top (isolate 0.254): 80,78.86 95,78.86 95,93.84 80,93.84
GND9  (via drill 0.51)
  Top 0.305: C17.2 60.08,41.29 IC6.7 60.73,43.72 IC6.3 61.6,43.72 62.77,44.89 64.9,44.89 65.38,44.41 R32.1 C18.2 | 54.78,5.13 54.54,4.89 54.54,4.48 U$11.1 | C21.2 55.61,29.64 C22.2 55.74,29.47 C19.2 C20.2 60.05,27.93 60.71,28.59 U2.14
  Top 0.406: C20.2 58.29,27.93 v59.05,27.17 | EZ-FET-JUMPER1.1 JP11.1 56.7,40.37 58.22,38.85 59.89,38.85 60.61,39.57 60.58,39.6 C17.2 60.58,39.94 v61.28,39.24 | LED6.C LED5.C LED4.C 79.34,12.35 v76.5,15.19 | U$13.1 56.6,15.06 | 56.6,15.06 v56.6,16.74 | 56.6,15.06 57.01,15.47 v62.83,15.47
  Top 0.61: U$13.1 U$12.1 54.78,4.72 54.54,4.48
  Bottom 0.406: v56.6,16.74 56.6,21.59 59.05,24.04 v59.05,27.17 61.28,29.4 v61.28,39.24 | v62.83,15.47 76.22,15.47 v76.5,15.19
  other vias: 71.65,46.27 67.03,25.31
  pour Top (isolate 0.254): 48.61,52.09 88.07,52.09 88.07,0.1 48.61,0.1
  pour Bottom (isolate 0.254): 48.61,52.09 88.07,52.09 88.07,0.1 48.61,0.1
GND10  (via drill 0.5)
  Top 0.254: C25.1 v70.75,60.5 C26.1 | IC7.6 77.74,60.27 v78.55,59.47 v78.55,59.46 | C27.2 69.87,71.3 70.01,71.16 70.02,71.17 IC8.7 71.74,70.52 IC8.3 73.14,70.12 C23.2 | C23.2 76.24,65.32 | 76.24,65.32 C24.2 | C23.2 74.96,67.02 v74.91,66.97 | C28.2 R38.1 73.7,65.32 76.24,65.32
  Bottom 0.254: 77.51,60.5 v78.55,59.46 80.99,61.9 80.99,70.5 JP14.7 85.2,74.71 JP13.8 | 77.51,60.5 76.56,61.45 76.56,65.32 v74.91,66.97 | v70.75,60.5 77.51,60.5
  other vias: 84.27,56.23 84.45,60.85 69.29,67.13
  pour Bottom (isolate 0.254): 64.49,76.84 89.47,76.84 89.47,54.84 64.49,54.84
  pour Top (isolate 0.254): 64.49,76.84 64.49,54.87 89.49,54.87 89.49,76.85 64.48,76.85
N$1
  Top 0.406: S1.6 35.43,4.65 39.79,4.65 40.66,5.52 40.65,5.53 R1.2
N$2
  Top 0.406: R2.2 38.95,5.64 38.62,5.31 35.85,5.31 35.52,5.64 35.52,6.96 35.28,7.2 32.14,7.2 31.91,6.97 S1.5
N$3
  Top 0.406: S1.4 29.37,7.26 29.87,7.76 35.54,7.76 36.11,7.19 36.11,6.68 36.28,6.51 R3.2
N$4
  Top 0.61: LED1.A R3.1
N$5
  Top 0.61: LED2.A R2.1
N$6
  Top 0.61: LED3.A R1.1
N$7
  Top 0.305: 17.53,4.09 17.6,4.16 U$1.2
  Top 0.61: S1.1 19.56,5.63 U$1.2
N$8
  Top 0.61: U$2.2 22.66,8.66 24.31,7.01 24.29,6.99 S1.2
N$9
  Top 0.305: 18.09,12.75 U$3.2
  Top 0.61: S1.3 26.83,6.78 24.13,9.48 20.78,9.48 18.09,12.17 U$3.2
N$10
  Top 0.254: R9.1 R6.2 | R6.2 17.08,61 | R6.2 17.35,60.99 17.91,60.42 17.91,60.01 18.22,59.7 IC2.7
N$11
  Top 0.254: R7.2 R8.2 IC2.8
N$12
  Top 0.305: IC1.2 19.72,42.99 20.71,42 21.49,42 | 21.49,42 R4.1 | R5.2 21.39,42.1 21.49,42
N$13
  Top 0.254: IC3.2 13.16,69.87 R10.1 R11.2
N$14
  Top 0.305: U1.13 17.14,29.01 Y1.1 16.01,29.03 C8.1
N$15
  Top 0.254: R6.1 14.99,60.99 Y2.2 14.91,62.27 C9.2
N$16
  Top 0.305: U1.12 18.58,29.51 17.96,30.13 Y1.2 17.12,30.67 17.13,30.68 16.5,31.31 C7.1
N$17
  Top 0.254: R7.1 14.96,60.02 | 14.96,60.02 Y2.1 | C10.2 14.96,58.84 14.96,60.02
N$18
  Top 0.254: R14.1 46.48,68.19 | 46.48,68.19 47.7,69.41 IC5.2 | R15.2 46.48,68.19
N$19
  Top 0.254: R12.1 52.7,60.82 Y3.2 52.82,59.61 C13.2
N$20
  Top 0.254: R13.1 52.7,61.68 Y3.1 52.82,62.9 C14.2
N$21
  Top 0.61: R16.1 5.49,89.15 U$6.A
N$22  (via drill 0.51)
  Top 0.61: v10.71,91.36 11.15,91.8 R17.1 12.07,91.77 U$6.C
  Bottom 0.61: JP5.4 10.04,90.69 v10.71,91.36
N$23
  Bottom 0.61: S2.2 6.38,84.46 4.98,83.06 4.98,81.4 JP5.2
N$24
  Bottom 0.61: JP5.1 S2.1
N$25
  Top 0.61: R18.1 21.49,89.16 U$9.A
N$26  (via drill 0.51)
  Top 0.61: v26.71,91.37 27.15,91.81 R19.1 28.07,91.78 U$9.C
  Bottom 0.61: JP6.4 26.04,90.7 v26.71,91.37
N$27
  Bottom 0.61: S3.2 22.38,84.47 20.98,83.07 20.98,81.41 JP6.2
N$28
  Bottom 0.61: JP6.1 S3.1
N$29
  Top 0.61: R20.1 37.49,89.16 U$15.A
N$30  (via drill 0.51)
  Top 0.61: v42.71,91.37 43.15,91.81 R21.1 44.07,91.78 U$15.C
  Bottom 0.61: JP7.4 42.04,90.7 v42.71,91.37
N$31
  Bottom 0.61: S4.2 38.38,84.47 36.98,83.07 36.98,81.41 JP7.2
N$32
  Bottom 0.61: JP7.1 S4.1
N$33
  Top 0.61: R22.1 53.49,89.16 U$21.A
N$34  (via drill 0.51)
  Top 0.61: v58.71,91.37 59.15,91.81 R23.1 60.07,91.78 U$21.C
  Bottom 0.61: JP8.4 58.04,90.7 v58.71,91.37
N$35
  Bottom 0.61: S5.2 54.38,84.47 52.98,83.07 52.98,81.41 JP8.2
N$36
  Bottom 0.61: JP8.1 S5.1
N$37
  Top 0.61: R24.1 69.49,89.16 U$27.A
N$38  (via drill 0.51)
  Top 0.61: v74.71,91.37 75.15,91.81 R25.1 76.07,91.78 U$27.C
  Bottom 0.61: JP9.4 74.04,90.7 v74.71,91.37
N$39
  Bottom 0.61: S6.2 70.38,84.47 68.98,83.07 68.98,81.41 JP9.2
N$40
  Bottom 0.61: JP9.1 S6.1
N$41
  Top 0.61: R26.1 85.49,89.18 U$10.A
N$42  (via drill 0.51)
  Top 0.61: v90.71,91.39 91.15,91.83 R27.1 92.07,91.8 U$10.C
  Bottom 0.61: JP10.4 90.04,90.72 v90.71,91.39
N$43
  Bottom 0.61: S7.2 86.38,84.49 84.98,83.09 84.98,81.43 JP10.2
N$44
  Bottom 0.61: JP10.1 S7.1
N$45
  Top 0.305: U2.12 60.67,29.59 60.05,30.21 Y4.2 59.21,30.75 59.22,30.76 58.59,31.39 C21.1
N$46
  Top 0.305: U2.13 59.23,29.09 Y4.1 58.1,29.11 C22.1
N$47
  Top 0.61: LED4.A R30.1
N$48
  Top 0.61: LED5.A R29.1
N$49
  Top 0.61: LED6.A R28.1
N$50
  Top 0.305: 59.62,4.17 59.69,4.24 U$11.2
  Top 0.61: S8.1 61.65,5.71 U$11.2
N$51
  Top 0.61: U$12.2 64.75,8.74 66.4,7.09 66.38,7.07 S8.2
N$52
  Top 0.305: 60.18,12.83 U$13.2
  Top 0.61: S8.3 68.92,6.86 66.22,9.56 62.87,9.56 60.18,12.25 U$13.2
N$53
  Top 0.305: IC6.2 61.81,43.07 62.8,42.08 63.58,42.08 | 63.58,42.08 R31.1 | R32.2 63.48,42.18 63.58,42.08
N$54
  Top 0.406: S8.6 77.52,4.73 81.88,4.73 82.75,5.6 82.74,5.61 R28.2
N$55
  Top 0.406: R29.2 81.04,5.72 80.71,5.39 77.94,5.39 77.61,5.72 77.61,7.04 77.37,7.28 74.23,7.28 74,7.05 S8.5
N$56
  Top 0.406: S8.4 71.46,7.34 71.96,7.84 77.63,7.84 78.2,7.27 78.2,6.76 78.37,6.59 R30.2
N$57
  Top 0.254: R36.1 R33.2 | R33.2 75.01,60.92 | R33.2 75.27,60.91 75.84,60.34 75.84,59.93 76.15,59.62 IC7.7
N$58
  Top 0.254: R34.2 R35.2 IC7.8
N$59
  Top 0.254: IC8.2 71.09,69.79 R37.1 R38.2
N$60
  Top 0.254: R33.1 72.92,60.91 Y5.2 72.84,62.19 C25.2
N$61
  Top 0.254: R34.1 72.89,59.94 | 72.89,59.94 Y5.1 | C26.2 72.89,58.76 72.89,59.94
P1.0  (via drill 0.5)
  Top 0.254: IC2.2 17.34,62.95 v16.93,63.36
  Bottom 0.254: v16.93,63.36 10.58,69.71 JP2.6
P1.1  (via drill 0.5)
  Top 0.254: IC2.1 18.92,63.62 17.73,63.62 v16.73,64.62
  Bottom 0.254: v16.73,64.62 9.58,71.77 9.56,71.77 JP2.7
P1.2  (via drill 0.51)
  Top 0.305: U1.26 20.06,22.51 19.26,21.71 v19.26,17.4
  Bottom 0.305: v19.26,17.4 19.26,5.48 15.58,1.8 9.09,1.8 H_LEFT.1
P1.3  (via drill 0.51)
  Top 0.305: U1.25 19.91,23.01 18.51,21.61 v18.51,18.37
  Bottom 0.305: v18.51,18.37 18.51,7.26 15.62,4.37 H_LEFT.2
P1.4  (via drill 0.51)
  Top 0.305: U1.24 19.7,23.51 17.77,21.58 v17.77,19.18
  Bottom 0.305: v17.77,19.18 17.77,9.15 15.54,6.92 H_LEFT.3
P1.5  (via drill 0.51)
  Top 0.305: U1.23 19.53,24.01 17.03,21.51 v17.03,19.98
  Bottom 0.305: v17.03,19.98 17.03,10.84 15.64,9.45 H_LEFT.4
P1.6  (via drill 0.51)
  Top 0.305: U1.22 19.34,24.51 16.26,21.43 v16.26,20.71
  Bottom 0.305: v16.26,20.71 16.26,12.74 15.51,11.99 H_LEFT.5
P1.7
  Top 0.305: U1.21 19.12,25.01 12.4,18.29 12.4,16.17 10.76,14.53 H_LEFT.6
P1.8
  Top 0.254: IC2.20 26.1,63.61 26.32,63.83 26.32,69.51 JP3.7
P1.9
  Top 0.254: IC2.19 26.02,62.95 26.73,63.66 26.73,68.84 27.6,69.71 JP3.6
P1.10
  Top 0.254: IC2.18 25.94,62.3 27.13,63.49 27.13,66.83 27.47,67.17 JP3.5
P1.11
  Top 0.254: IC2.17 25.87,61.66 27.54,63.32 27.54,64.48 27.7,64.64 27.71,64.63 JP3.4
P1.12
  Top 0.254: JPL.3 42.07,62.11 43.19,60.99 IC4.10
P1.13
  Top 0.254: JPL.4 40.1,64.65 43.26,61.49 IC4.9
P1.14
  Top 0.254: IC4.8 43.33,61.99 41.3,64.02 41.3,66.05 40.16,67.19 JPL.5
P1.15
  Top 0.254: JPL.6 40.04,69.73 41.71,68.06 41.71,64.19 43.41,62.49 IC4.7
P1.16
  Top 0.254: IC4.5 45.4,63.81 42.52,66.69 42.52,70.85 JPL.8
P1.17
  Top 0.254: JPL.7 40.52,72.27 42.11,70.68 42.11,66.52 44.9,63.73 IC4.6
P1.18
  Top 0.305: U2.21 61.21,25.09 54.49,18.37 54.49,16.25 52.85,14.61 H_LEFT1.6
P1.19  (via drill 0.51)
  Top 0.305: U2.22 61.43,24.59 58.35,21.51 v58.35,20.79
  Bottom 0.305: v58.35,20.79 58.35,12.82 57.6,12.07 H_LEFT1.5
P1.20  (via drill 0.51)
  Top 0.305: U2.23 61.62,24.09 59.12,21.59 v59.12,20.06
  Bottom 0.305: v59.12,20.06 59.12,10.92 57.73,9.53 H_LEFT1.4
P1.21  (via drill 0.51)
  Top 0.305: U2.24 61.79,23.59 59.86,21.66 v59.86,19.26
  Bottom 0.305: v59.86,19.26 59.86,9.23 57.63,7 H_LEFT1.3
P1.22  (via drill 0.51)
  Top 0.305: U2.25 62,23.09 60.6,21.69 v60.6,18.45
  Bottom 0.305: v60.6,18.45 60.6,7.34 57.71,4.45 H_LEFT1.2
P1.23  (via drill 0.51)
  Top 0.305: U2.26 62.15,22.59 61.35,21.79 v61.35,17.48
  Bottom 0.305: v61.35,17.48 61.35,5.56 57.67,1.88 51.18,1.88 H_LEFT1.1
P1.24  (via drill 0.5)
  Top 0.254: IC7.1 76.85,63.54 75.66,63.54 v74.66,64.54
  Bottom 0.254: v74.66,64.54 67.51,71.69 67.49,71.69 JP12.7
P1.25  (via drill 0.5)
  Top 0.254: IC7.2 75.27,62.88 v74.86,63.28
  Bottom 0.254: v74.86,63.28 68.51,69.63 JP12.6
P1.26
  Top 0.254: IC7.20 84.02,63.53 84.25,63.75 84.25,69.43 JP13.7
P1.27
  Top 0.254: IC7.19 83.95,62.88 84.66,63.58 84.66,68.75 85.53,69.63 JP13.6
P1.28
  Top 0.254: IC7.18 83.87,62.23 85.06,63.41 85.06,66.75 85.4,67.09 JP13.5
P1.29
  Top 0.254: IC7.17 83.8,61.58 85.47,63.24 85.47,64.4 85.63,64.56 85.64,64.55 JP13.4
P2.0
  Top 0.305: U1.42 31.15,28.01 40.63,18.53 40.63,16.96 H_RIGHT.6
P2.1
  Top 0.305: U1.41 30.94,27.51 40.08,18.37 40.08,14.97 H_RIGHT.5
P2.2  (via drill 0.51)
  Top 0.305: U1.40 30.78,27.01 37.75,20.04 v37.75,19.12
  Bottom 0.305: H_RIGHT.4 43.03,9.42 39.52,9.42 37.75,11.19 v37.75,19.12
P2.3
  Top 0.254: IC2.14 26.68,59.7 JP3.3
P2.4
  Top 0.254: JP3.2 28.57,59.05 IC2.13
P2.5  (via drill 0.51)
  Top 0.305: U1.37 31.46,25.51 37,19.97 v37,18.26
  Bottom 0.305: H_RIGHT.3 38.54,6.91 37,8.45 v37,18.26
P2.6  (via drill 0.51)
  Top 0.305: U1.36 31.14,25.01 36.25,19.9 v36.25,17.43
  Bottom 0.305: H_RIGHT.2 38.54,4.37 36.25,6.66 v36.25,17.43
P2.7  (via drill 0.51)
  Top 0.305: U1.35 30.95,24.51 35.51,19.95 v35.51,16.46
  Bottom 0.305: H_RIGHT.1 38.53,1.83 | 38.53,1.83 38.53,1.81 | 35.51,16.58 v35.51,16.46 35.51,4.85 38.53,1.83
P2.8
  Top 0.254: JP3.1 27.66,58.41 IC2.12
P2.9
  Top 0.254: R9.2 16.07,62.95 15.75,63.27 15.75,63.28 15.5,63.52 11.94,63.52 11.78,63.68 11.78,64.47 JP2.5
P2.10
  Top 0.254: 16.07,58.95 R8.1 16.07,58.11 15.59,57.62 12.05,57.62 11.89,57.78 11.89,62.44 10.05,64.28 9.43,64.28 JP2.4
P2.11
  Top 0.254: IC2.9 18.79,58.26 16.8,58.26 15.75,57.21 11.89,57.21 11.48,57.62 11.48,60.24 9.96,61.76 9.41,61.76 JP2.3
P2.12
  Top 0.254: 18.92,57.75 IC2.10 16.87,57.76 15.92,56.81 11.72,56.81 11.04,57.49 11.04,58.86 10.35,59.55 JP2.2
P2.13
  Top 0.254: JP2.1 10.32,55.77 22.82,55.77 IC2.11
P2.14
  Top 0.254: IC4.17 46.9,58.6 47.81,57.69 54.95,57.69 55.94,58.68 55.94,64.57 JPR.5
P2.15
  Top 0.254: JPR.4 56.35,62.44 56.35,58.51 55.12,57.28 47.65,57.28 46.4,58.53 IC4.16
P2.16
  Top 0.254: JPR.3 58.56,61.8 56.76,60 56.76,58.34 55.29,56.88 47.48,56.88 45.9,58.45 IC4.15
P2.17
  Top 0.254: IC4.13 44.9,58.3 47.14,56.06 55.63,56.06 56.59,57.03 JPR.1
P2.18
  Top 0.254: IC4.11 39.48,60.49 JPL.2
P2.19  (via drill 0.5)
  Top 0.254: IC4.19 48.95,59.19 v49.26,59.19
  Bottom 0.254: JPR.6 56.59,69.73 55.84,68.98 55.84,65.61 49.42,59.19 v49.26,59.19
P2.20
  Top 0.305: U2.42 73.24,28.09 82.72,18.61 82.72,17.04 H_RIGHT1.6
P2.21
  Top 0.305: U2.41 73.03,27.59 82.17,18.45 82.17,15.05 H_RIGHT1.5
P2.22  (via drill 0.51)
  Top 0.305: U2.40 72.87,27.09 79.84,20.12 v79.84,19.2
  Bottom 0.305: H_RIGHT1.4 85.12,9.5 81.61,9.5 79.84,11.27 v79.84,19.2
P2.23  (via drill 0.51)
  Top 0.305: U2.37 73.55,25.59 79.09,20.05 v79.09,18.34
  Bottom 0.305: H_RIGHT1.3 80.63,6.99 79.09,8.53 v79.09,18.34
P2.24  (via drill 0.51)
  Top 0.305: U2.36 73.23,25.09 78.34,19.98 v78.34,17.51
  Bottom 0.305: H_RIGHT1.2 80.63,4.45 78.34,6.74 v78.34,17.51
P2.25  (via drill 0.51)
  Top 0.305: U2.35 73.04,24.59 77.6,20.03 v77.6,16.54
  Bottom 0.305: H_RIGHT1.1 80.62,1.91 | 80.62,1.91 80.62,1.89 | 77.6,16.66 v77.6,16.54 77.6,4.93 80.62,1.91
P2.26
  Top 0.254: IC7.14 84.61,59.62 JP13.3
P2.27
  Top 0.254: JP13.2 86.49,58.98 IC7.13
P2.28
  Top 0.254: JP13.1 85.59,58.33 IC7.12
P2.29
  Top 0.254: R36.2 74,62.87 73.68,63.19 73.68,63.2 73.44,63.44 69.87,63.44 69.71,63.6 69.71,64.39 JP12.5
P2.30
  Top 0.254: 74,58.87 R35.1 74,58.02 73.52,57.54 69.98,57.54 69.82,57.7 69.82,62.36 67.98,64.2 67.36,64.2 JP12.4
P2.31
  Top 0.254: 76.85,58.32 IC7.9 76.72,58.18 74.73,58.18 73.68,57.13 69.82,57.13 69.41,57.54 69.41,60.16 67.89,61.68 67.34,61.68 JP12.3
P2.32
  Top 0.254: 76.85,57.66 IC7.10 74.8,57.68 73.85,56.73 69.65,56.73 68.97,57.41 68.97,58.78 68.28,59.47 JP12.2
P2.33
  Top 0.254: JP12.1 68.25,55.69 80.75,55.69 IC7.11
P3.0
  Top 0.305: U1.56 31.42,35.01 39.58,43.17 39.58,48.12 41.55,50.09 H_RIGHT.20
P3.1
  Top 0.305: U1.55 31.61,34.51 40.08,42.98 40.08,45.28 40.06,45.3 40.06,46.93 40.68,47.55 H_RIGHT.19
P3.2
  Top 0.305: U1.54 31.76,34.01 42.76,45.01 H_RIGHT.18
P3.3
  Top 0.305: U1.53 31.91,33.51 40.87,42.47 H_RIGHT.17
P3.4
  Top 0.305: U1.52 32.07,33.01 38.99,39.93 H_RIGHT.16
P3.5
  Top 0.305: U1.51 32.22,32.51 37.1,37.39 H_RIGHT.15
P3.6
  Top 0.305: U1.50 32.4,32.01 35.24,34.85 H_RIGHT.14
P3.7
  Top 0.305: U1.49 32.61,31.51 33.44,32.34 43.03,32.34 H_RIGHT.13
P3.8
  Top 0.254: JPR.2 55.46,56.47 47.31,56.47 45.4,58.38 IC4.14
P3.9
  Top 0.254: IC4.12 41.52,59.99 JPL.1
P3.10  (via drill 0.5)
  Top 0.254: IC4.20 49.05,60.49 v49.28,60.26
  Bottom 0.254: v49.28,60.26 49.91,60.26 55.43,65.78 55.43,69.14 JPR.7
P3.11
  Top 0.305: U2.56 73.51,35.09 81.67,43.25 81.67,48.2 83.64,50.17 H_RIGHT1.20
P3.12
  Top 0.305: U2.55 73.7,34.59 82.17,43.06 82.17,45.36 82.15,45.38 82.15,47.01 82.77,47.63 H_RIGHT1.19
P3.13
  Top 0.305: U2.54 73.85,34.09 84.85,45.09 H_RIGHT1.18
P3.14
  Top 0.305: U2.53 74,33.59 82.96,42.55 H_RIGHT1.17
P3.15
  Top 0.305: U2.52 74.16,33.09 81.08,40.01 H_RIGHT1.16
P3.16
  Top 0.305: U2.51 74.31,32.59 79.19,37.47 H_RIGHT1.15
P3.17
  Top 0.305: U2.50 74.49,32.09 77.33,34.93 H_RIGHT1.14
P3.18
  Top 0.305: U2.49 74.7,31.59 75.53,32.42 85.12,32.42 H_RIGHT1.13
P4.0
  Top 0.305: U1.18 18.52,26.51 14.16,22.15 H_LEFT.9
P4.1
  Top 0.305: U2.7 61.48,32.09 58.64,34.93 H_LEFT1.14
P4.2
  Top 0.305: U2.8 61.33,31.59 58.94,33.98 54.25,33.98 52.66,32.39 H_LEFT1.13
P4.3
  Top 0.305: H_LEFT.10 11.13,24.68 12.39,25.94 12.39,32.06 12.78,32.45 16.31,32.45 18.75,30.01 U1.11
P4.4
  Top 0.305: U1.10 18.92,30.51 16.48,32.95 12.57,32.95 11.93,32.31 11.93,28.36 10.81,27.24 H_LEFT.11
P4.5
  Top 0.305: U1.9 19.08,31.01 16.66,33.43 12.35,33.43 11.37,32.45 11.37,30.52 10.63,29.78 H_LEFT.12
P4.6
  Top 0.305: U1.8 19.24,31.51 16.85,33.9 12.16,33.9 10.57,32.31 H_LEFT.13
P4.7
  Top 0.305: U1.7 19.39,32.01 16.55,34.85 H_LEFT.14
P4.8
  Top 0.305: U2.9 61.17,31.09 58.75,33.51 54.44,33.51 53.46,32.53 53.46,30.6 52.72,29.86 H_LEFT1.12
P4.9
  Top 0.305: U2.10 61.01,30.59 58.57,33.03 54.66,33.03 54.02,32.39 54.02,28.44 52.9,27.32 H_LEFT1.11
P4.10
  Top 0.305: H_LEFT1.10 53.22,24.76 54.48,26.02 54.48,32.14 54.87,32.53 58.4,32.53 60.84,30.09 U2.11
P4.11
  Top 0.305: U2.18 60.61,26.59 56.25,22.23 H_LEFT1.9
P5.0  (via drill 0.51)
  Top 0.305: 21.79,12.11 S1.12 | U1.34 27.48,24.01 25.85,22.38 25.85,18 v21.77,13.92
  Top 0.61: v21.77,13.92 21.77,12.12 21.79,12.11
  Bottom 0.61: 21.8,13.84 21.77,13.87 v21.77,13.92 H_BOT.6
P5.1  (via drill 0.51)
  Top 0.305: U1.33 27.63,23.51 26.36,22.24 26.36,16.06 24.29,13.99 v24.29,13.88
  Top 0.61: v24.29,13.88 S1.11
  Bottom 0.61: H_BOT.5 v24.3,13.87 v24.29,13.88
P5.2  (via drill 0.51)
  Top 0.305: v26.83,13.96 26.83,22.05 27.79,23.01 U1.32
  Top 0.61: S1.10 v26.83,13.96
  Bottom 0.61: v26.83,13.96 H_BOT.4
P5.3  (via drill 0.51)
  Top 0.305: v29.38,13.93 27.31,16 27.31,21.86 27.96,22.51 U1.31
  Top 0.61: S1.9 v29.37,13.93 v29.38,13.93
  Bottom 0.61: v29.38,13.93 H_BOT.3
P5.4  (via drill 0.51)
  Top 0.305: v31.91,13.91 v31.92,13.92 27.82,18.02 27.82,21.72 28.11,22.01 U1.30
  Top 0.61: S1.8 v31.91,13.91 v31.92,13.91
  Bottom 0.61: H_BOT.2 v31.92,13.91
P5.5  (via drill 0.51)
  Top 0.305: v34.45,13.9 33.02,13.9 28.3,18.62 28.3,21.3 28.51,21.51 U1.29
  Top 0.61: S1.7 v34.45,13.9
  Bottom 0.61: v34.45,13.9 H_BOT.1
P5.6  (via drill 0.51)
  Top 0.305: v76.54,13.98 75.11,13.98 70.39,18.7 70.39,21.38 70.6,21.59 U2.29
  Top 0.61: S8.7 v76.54,13.98
  Bottom 0.61: v76.54,13.98 H_BOT1.1
P5.7  (via drill 0.51)
  Top 0.305: v74,13.99 v74.01,14 69.91,18.1 69.91,21.8 70.2,22.09 U2.30
  Top 0.61: S8.8 v74,13.99 v74.01,13.99
  Bottom 0.61: H_BOT1.2 v74.01,13.99
P5.8  (via drill 0.51)
  Top 0.305: 63.88,12.19 S8.12 | U2.34 69.57,24.09 67.94,22.46 67.94,18.08 v63.86,14
  Top 0.61: v63.86,14 63.86,12.21 63.88,12.19
  Bottom 0.61: 63.89,13.92 63.86,13.95 v63.86,14 H_BOT1.6
P5.9  (via drill 0.51)
  Top 0.305: U2.33 69.72,23.59 68.45,22.32 68.45,16.14 66.38,14.07 v66.38,13.96
  Top 0.61: v66.38,13.96 S8.11
  Bottom 0.61: H_BOT1.5 v66.39,13.95 v66.38,13.96
P5.10  (via drill 0.51)
  Top 0.305: v68.92,14.04 68.92,22.13 69.88,23.09 U2.32
  Top 0.61: S8.10 v68.92,14.04
  Bottom 0.61: v68.92,14.04 H_BOT1.4
P5.11  (via drill 0.51)
  Top 0.305: v71.47,14.01 69.4,16.08 69.4,21.94 70.05,22.59 U2.31
  Top 0.61: S8.9 v71.46,14.01 v71.47,14.01
  Bottom 0.61: v71.47,14.01 H_BOT1.3
P6.0
  Top 0.305: U1.48 32.33,31.01 33.58,29.76 H_RIGHT.12
P6.1
  Top 0.305: U1.47 32.16,30.51 35.44,27.23 H_RIGHT.11
P6.2
  Top 0.305: U1.46 31.95,30.01 37.27,24.69 H_RIGHT.10
P6.3
  Top 0.305: U1.45 31.77,29.51 39.13,22.15 H_RIGHT.9
P6.4
  Top 0.305: U1.44 31.54,29.01 40.98,19.57 43.02,19.57 H_RIGHT.8
P6.5
  Top 0.305: U1.43 31.34,28.51 42.78,17.07 H_RIGHT.7
P6.6
  Top 0.305: U2.48 74.42,31.09 75.67,29.84 H_RIGHT1.12
P6.7
  Top 0.305: U2.47 74.25,30.59 77.53,27.31 H_RIGHT1.11
P6.8
  Top 0.305: U2.46 74.04,30.09 79.36,24.77 H_RIGHT1.10
P6.9
  Top 0.305: U2.45 73.86,29.59 81.22,22.23 H_RIGHT1.9
P6.10
  Top 0.305: U2.44 73.63,29.09 83.07,19.65 85.11,19.65 H_RIGHT1.8
P6.11
  Top 0.305: U2.43 73.43,28.59 84.87,17.15 H_RIGHT1.7
P7.0
  Top 0.305: U1.6 19.58,32.51 16.7,35.39 14.12,35.39 12.12,37.39 H_LEFT.15
P7.1
  Top 0.305: U1.5 19.78,33.01 16.94,35.85 14.34,35.85 10.26,39.93 H_LEFT.16
P7.2
  Top 0.305: U1.4 19.94,33.51 17.13,36.32 15.21,36.32 H_LEFT.17
P7.3
  Top 0.305: U1.3 20.14,34.01 17.37,36.78 15.48,36.78 11.11,41.15 11.11,43.24 9.34,45.01 H_LEFT.18
P7.4
  Top 0.305: U1.2 20.29,34.51 17.53,37.27 15.74,37.27 11.57,41.44 11.57,45.04 H_LEFT.19
P7.5
  Top 0.305: H_LEFT.20 10.37,50.09 12.75,47.71 12.75,41.06 12.72,41.03 15.96,37.79 17.67,37.79 20.45,35.01 U1.1
P7.6
  Top 0.305: H_LEFT1.20 52.46,50.17 54.84,47.79 54.84,41.14 54.81,41.11 58.05,37.87 59.76,37.87 62.54,35.09 U2.1
P7.7
  Top 0.305: U2.3 62.23,34.09 59.46,36.86 57.57,36.86 53.2,41.23 53.2,43.32 51.43,45.09 H_LEFT1.18
P7.8
  Top 0.305: U2.2 62.38,34.59 59.62,37.35 57.83,37.35 53.66,41.52 53.66,45.12 H_LEFT1.19
P7.9
  Top 0.305: U2.4 62.03,33.59 59.22,36.4 57.3,36.4 H_LEFT1.17
P7.10
  Top 0.305: U2.5 61.87,33.09 59.03,35.93 56.43,35.93 52.35,40.01 H_LEFT1.16
P7.11
  Top 0.305: U2.6 61.67,32.59 58.79,35.47 56.21,35.47 54.21,37.47 H_LEFT1.15
P8.1
  Top 0.305: U2.19 60.82,26.09 54.42,19.69 H_LEFT1.8
P8.2
  Top 0.305: U1.20 18.9,25.51 10.46,17.07 H_LEFT.7
P8.3
  Top 0.305: U1.19 18.73,26.01 12.33,19.61 H_LEFT.8
P8.4
  Top 0.305: U2.20 60.99,25.59 52.55,17.15 H_LEFT1.7
RST  (via drill 0.51)
  Top 0.305: U1.16 25.22,27.51 25.83,28.12 v25.83,40.37
  Bottom 0.305: v25.83,40.37 32.39,46.93 EZ-FET-JUMPER.8
RST1
  Top 0.254: IC2.4 21.07,61.66 21.74,62.32 21.74,68.62 20.01,70.35 20.01,72.15 JP4.4
RST2  (via drill 0.5)
  Top 0.254: v48.7,64.72 47.4,63.41 IC4.1
  Bottom 0.254: POG.2 48.7,68.48 v48.7,64.72
RST3  (via drill 0.51)
  Top 0.305: U2.16 67.31,27.59 67.92,28.2 v67.92,40.45
  Bottom 0.305: v67.92,40.45 74.48,47.01 EZ-FET-JUMPER1.8
RST4
  Top 0.254: IC7.4 79,61.58 79.67,62.24 79.67,68.54 77.94,70.27 77.94,72.07 JP14.4
RTS  (via drill 0.51)
  Top 0.305: U1.39 28.54,26.51 28.42,26.63 28.42,36.84 v28.68,37.1
  Bottom 0.305: EZ-FET-JUMPER.4 22.23,47.83 23.86,46.2 23.86,39.5 26.26,37.1 v28.68,37.1
RTS1  (via drill 0.51)
  Top 0.305: U2.39 70.63,26.59 70.51,26.71 70.51,36.92 v70.77,37.18
  Bottom 0.305: EZ-FET-JUMPER1.4 64.32,47.91 65.95,46.28 65.95,39.58 68.35,37.18 v70.77,37.18
RXD
  Top 0.305: U1.27 24.1,22 26.92,24.82 26.92,37.97 27.31,38.36 EZ-FET-JUMPER.6
RXD1
  Top 0.254: JP4.8 23.59,72.58 22.55,71.54 22.55,62.5 24.04,61.01 IC2.16
RXD2  (via drill 0.5)
  Top 0.254: IC4.4 45.9,64.35 v45.53,64.72
  Bottom 0.254: POG.8 45.53,71.39 v45.53,64.72
RXD3
  Top 0.305: U2.27 66.19,22.08 69.01,24.9 69.01,38.05 69.4,38.44 EZ-FET-JUMPER1.6
RXD4
  Top 0.254: JP14.8 81.52,72.5 80.48,71.46 80.48,62.42 81.97,60.93 IC7.16
TST  (via drill 0.51)
  Top 0.305: U1.17 25.5,27.01 26.42,27.93 26.42,39.45 v26.57,39.6
  Bottom 0.305: v26.57,39.6 34.93,47.96 EZ-FET-JUMPER.9
TST1
  Top 0.254: IC2.3 20.96,62.3 21.33,62.68 21.33,68.45 19.6,70.18 19.6,71.98 19,72.59 17.03,72.59 JP4.2
TST2  (via drill 0.5)
  Top 0.254: v47.65,64.72 46.9,63.97 IC4.2
  Bottom 0.254: POG.4 47.65,69.97 v47.65,64.72
TST3  (via drill 0.51)
  Top 0.305: U2.17 67.59,27.09 68.51,28.01 68.51,39.53 v68.66,39.68
  Bottom 0.305: v68.66,39.68 77.02,48.04 EZ-FET-JUMPER1.9
TST4
  Top 0.254: IC7.3 78.88,62.23 79.26,62.6 79.26,68.37 77.53,70.1 77.53,71.9 76.92,72.51 74.96,72.51 JP14.2
TXD
  Top 0.305: U1.28 24.28,21.51 27.42,24.65 27.42,37.73 27.81,38.12 27.81,46.77 29.85,48.81 EZ-FET-JUMPER.7
TXD1
  Top 0.254: JP4.6 22.14,72.56 22.14,62.31 24.1,60.36 IC2.15
TXD2  (via drill 0.5)
  Top 0.254: v46.59,64.72 46.4,64.53 IC4.3
  Bottom 0.254: POG.6 46.59,71.45 v46.59,64.72
TXD3
  Top 0.305: U2.28 66.37,21.59 69.51,24.73 69.51,37.81 69.9,38.2 69.9,46.85 71.94,48.89 EZ-FET-JUMPER1.7
TXD4
  Top 0.254: JP14.6 80.07,72.48 80.07,62.23 82.03,60.27 IC7.15
VCC
  Top 0.61: R16.2 10.36,87.94 | R17.2 12.1,89.68 10.36,87.94 | JP5.5 10.36,83.6 10.36,87.94
VCC1
  Top 0.61: R18.2 26.36,87.95 | R19.2 28.1,89.69 26.36,87.95 | JP6.5 26.36,83.61 26.36,87.95
VCC2
  Top 0.61: R20.2 42.36,87.95 | R21.2 44.1,89.69 42.36,87.95 | JP7.5 42.36,83.61 42.36,87.95
VCC3
  Top 0.61: R22.2 58.36,87.95 | R23.2 60.1,89.69 58.36,87.95 | JP8.5 58.36,83.61 58.36,87.95
VCC4
  Top 0.61: R24.2 74.36,87.95 | R25.2 76.1,89.69 74.36,87.95 | JP9.5 74.36,83.61 74.36,87.95
VCC5
  Top 0.61: R26.2 90.36,87.97 | R27.2 92.1,89.71 90.36,87.97 | JP10.5 90.36,83.63 90.36,87.97
XIN
  Top 0.254: P2.1.1 50.67,62.49 R13.2 50.48,61.49 IC4.22
XOUT
  Top 0.254: P2.0.1 50.67,59.75 R12.2 50.5,60.99 IC4.21